# Altium PCB PCB_Project_Batteries_V2.PcbDoc
Units mm, origin at the board's own origin, x right, y up, seen from the top; angles counter-clockwise.
Board outline 92.15 x 89.13 mm, 2 copper layers (Top Layer, Bottom Layer), stack 1.57 mm thick; 37 components, 11 nets, 192 pads, 7 vias.
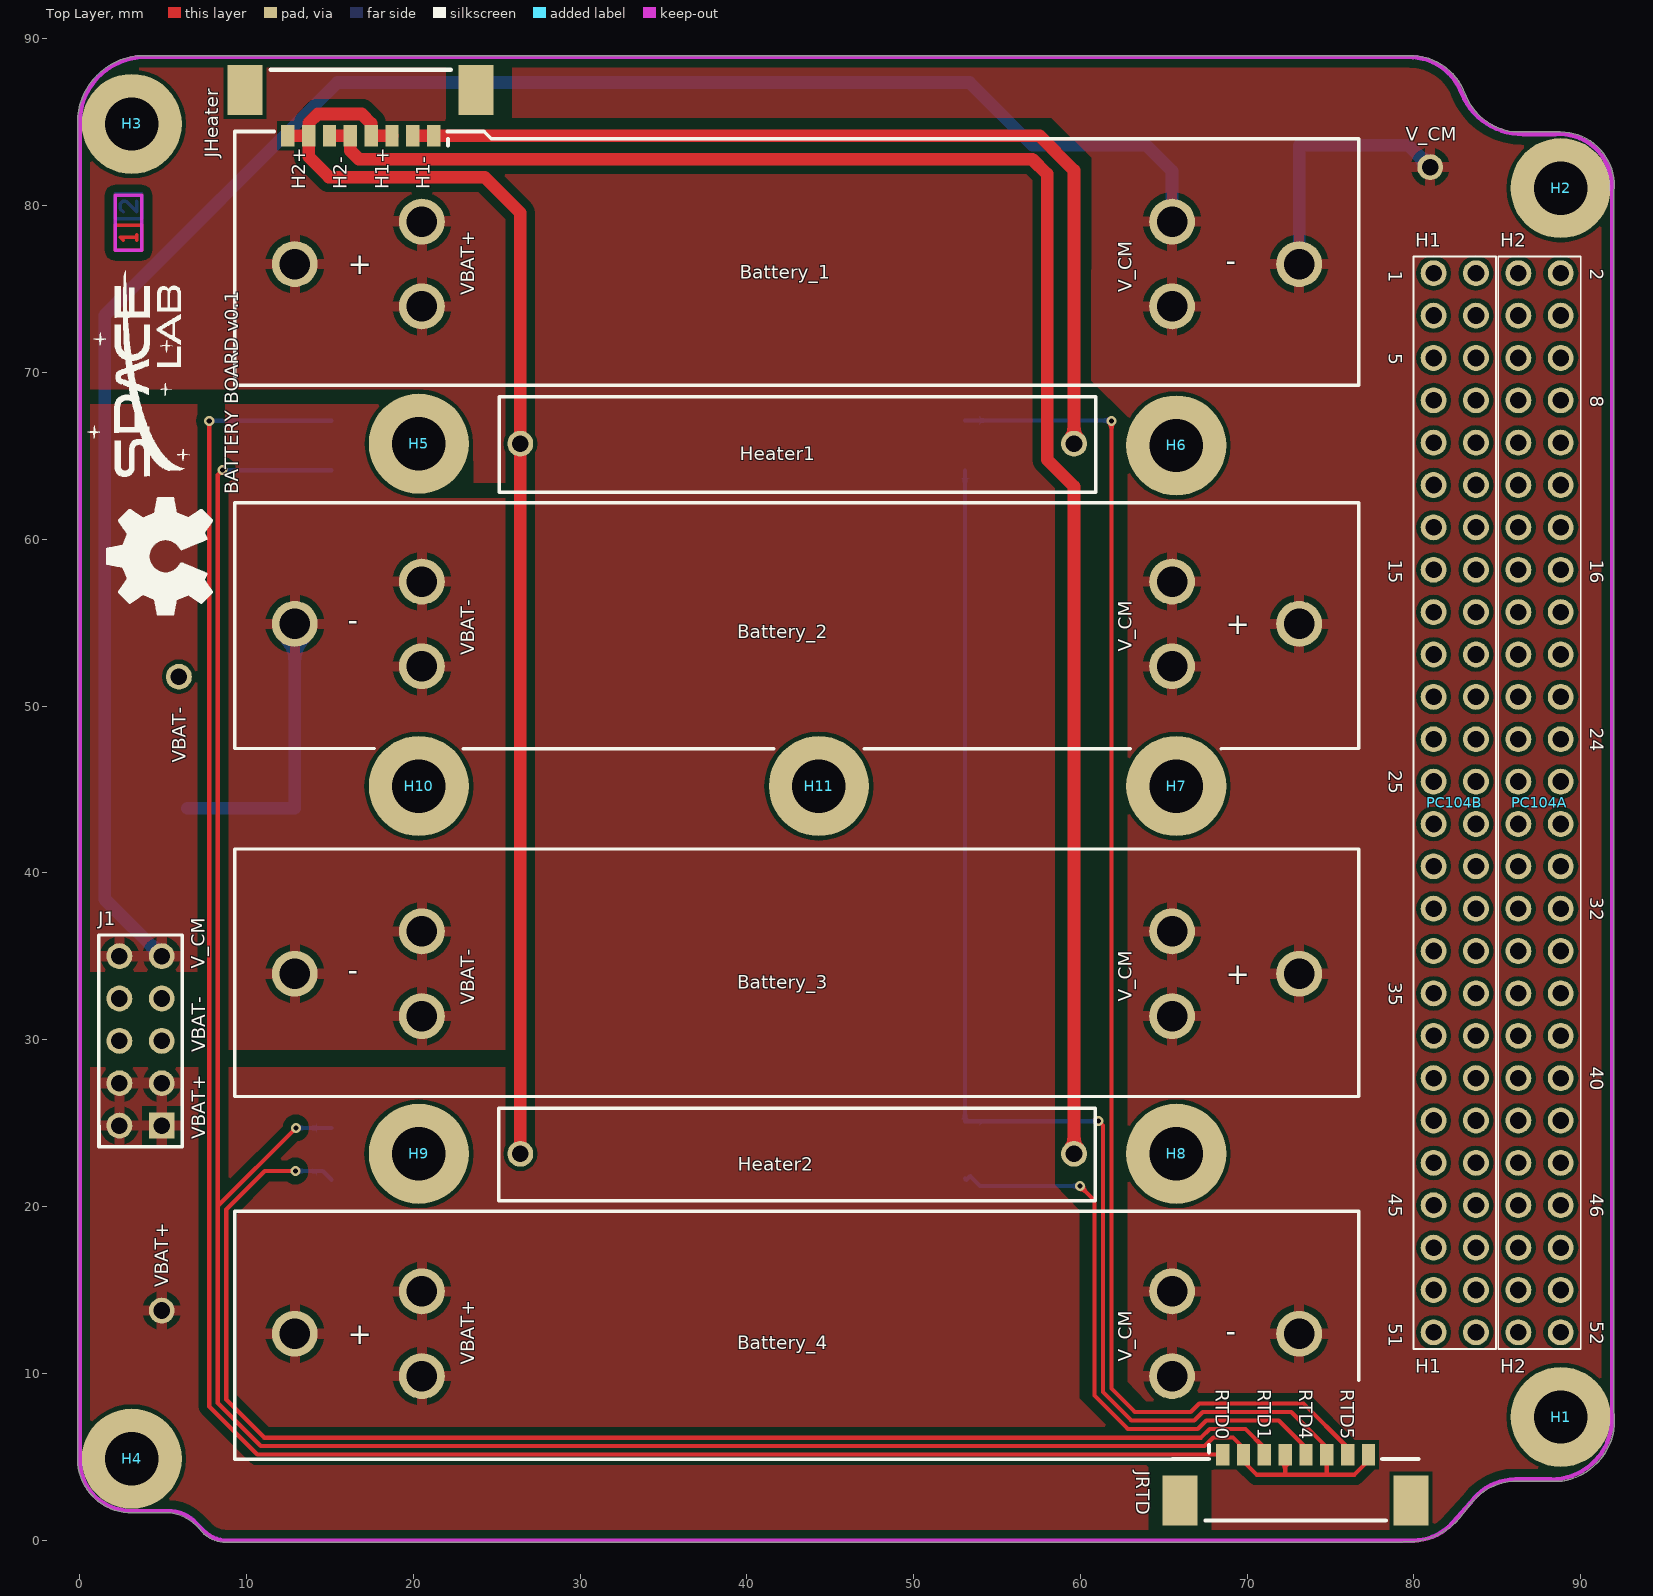
[diagram p0: Top Layer view]
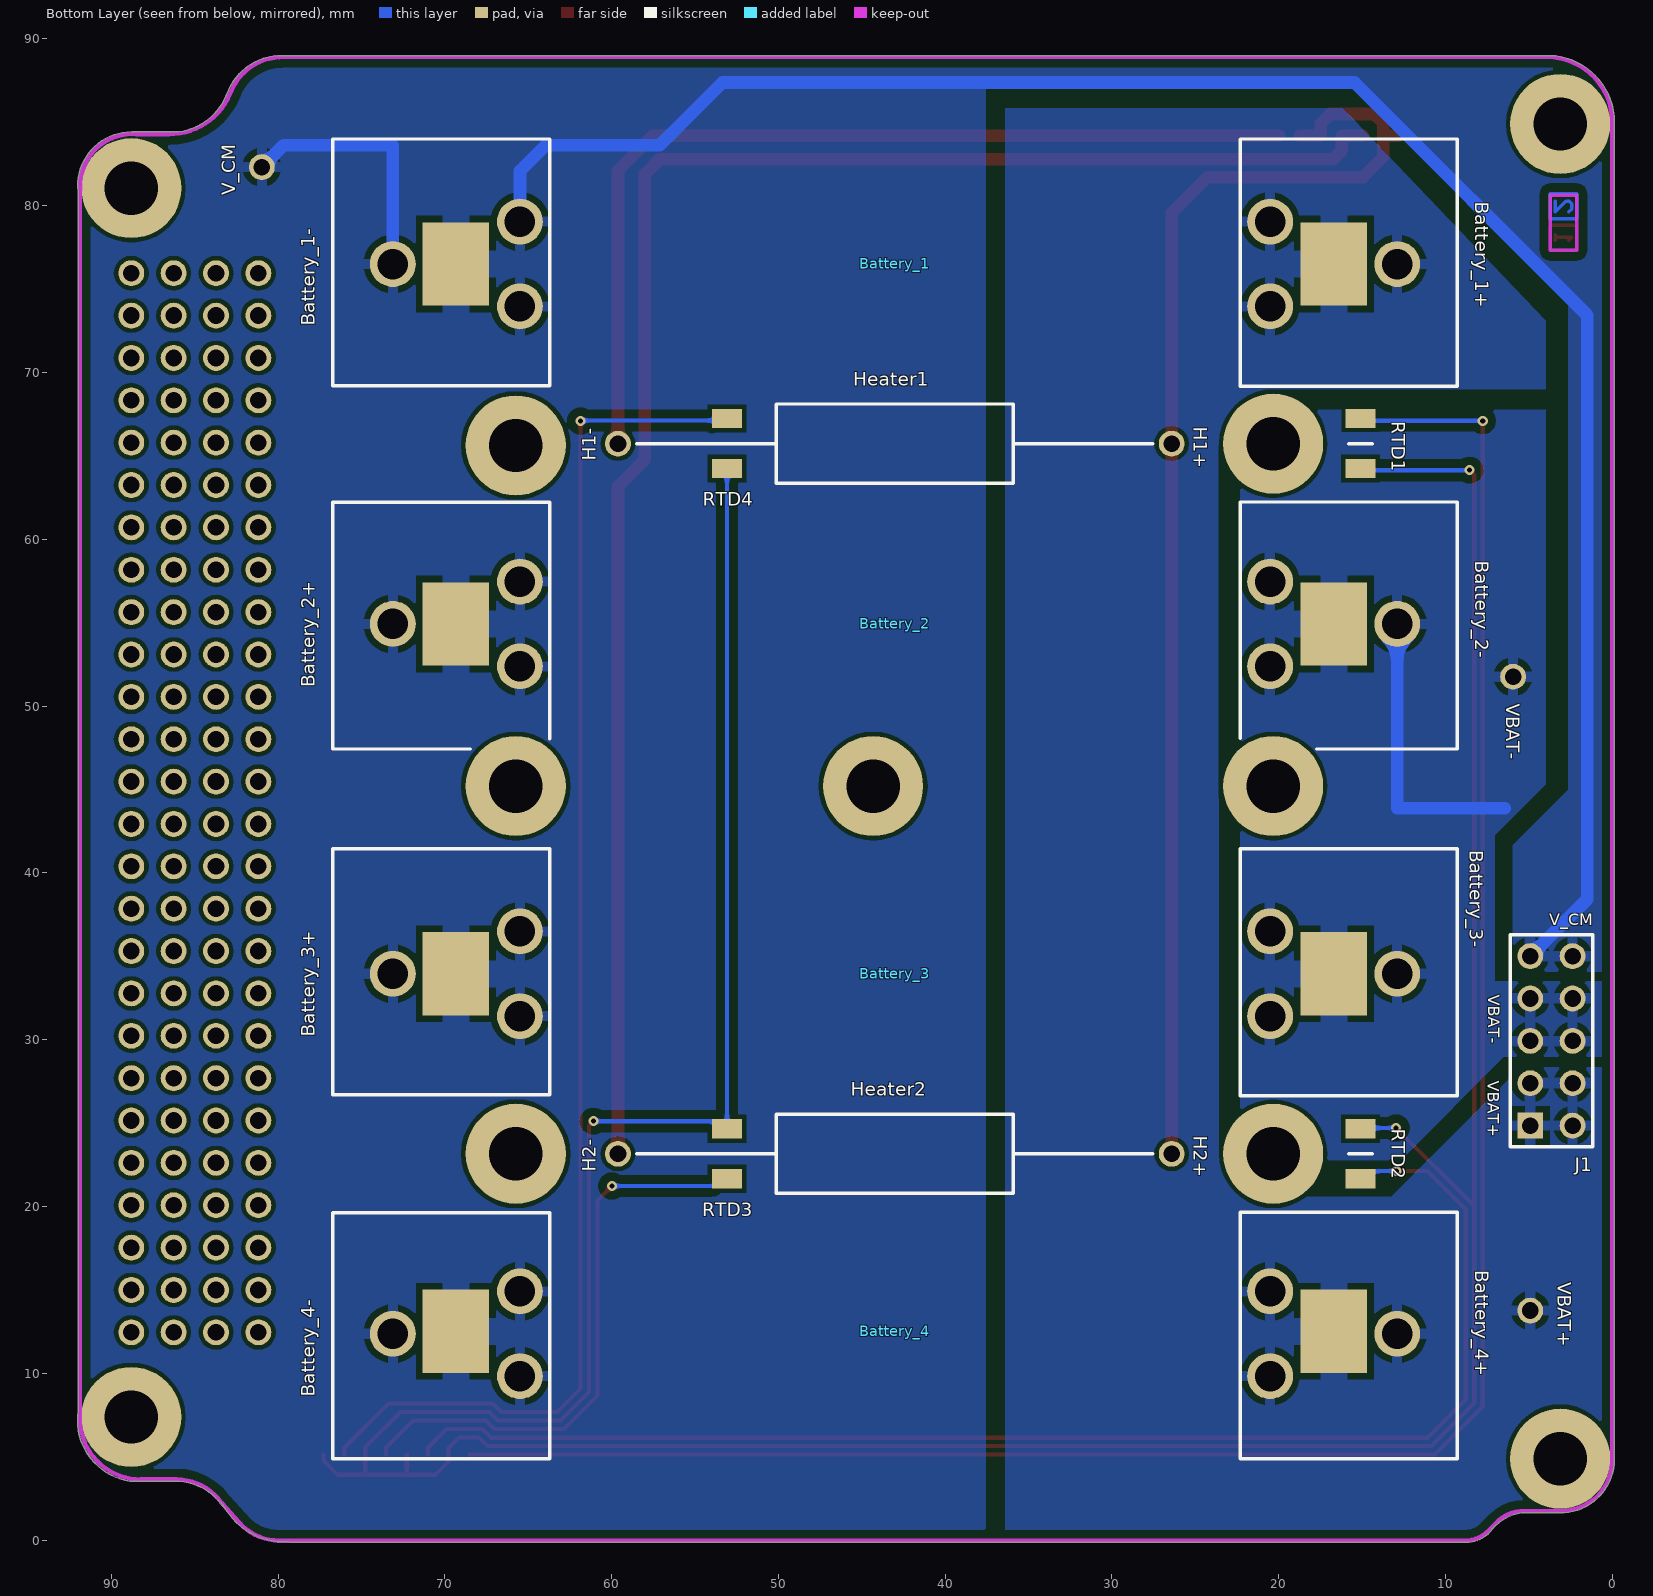
[diagram p1: Bottom Layer view, seen from below]

## Layer stack, top to bottom
Top Solder: solder mask 0.0099, Solder Resist, Dk 3.5
Top Layer: signal copper 0.0351
Dielectric Core: core 1.5001, FR-4, Dk 4.2
Bottom Layer: signal copper 0.0351
Bottom Solder: solder mask 0.0099, Solder Resist, Dk 3.5

## Board outline
92.004,81.131 92.003,81.056 cw(c91.907,81.053) 91.98,80.99 91.98,7.734 cw(c88.338,7.193) 92.02,7.191 cw(c88.316,7.191) 88.869,3.528 88.85,3.527 85.955,3.527 ccw(c86.222,-0.12) 83.133,1.837 cw(c79.593,4.08) 79.349,-0.104 cw(c79.275,0.003) 79.275,-0.127 8.726,-0.127 cw(c8.704,1.69) 7.33,0.501 ccw(c4.991,-1.263) 5.47,1.627 3.15,1.627 cw(c3.123,4.877) -0.127,4.853 -0.128,85.004 cw(c-0.033,85.004) -0.124,85.033 cw(c3.884,84.999) 3.799,89.006 3.825,89.007 79.724,89.007 cw(c79.778,85.51) 83.07,86.689 ccw(c86.414,87.986) 85.946,84.43 88.78,84.43 cw(c88.78,81.205)

## Design rules (kind name [scope] priority, off if disabled: settings)
Clearance [All] p1: gap=0.254 ignorepadtopadclearanceinfootprint=FALSE except(0: Arc-Hole Track-Hole SMDPad-Hole THPad-Hole Via-Hole Fill-Hole Poly-Hole Region-Hole Text-Hole; 0.508: Arc-Fill Arc-Poly Arc-Region Track-Fill Track-Poly Track-Region Via-Fill Via-Poly Via-Region Fill-Fill Fill-Poly Fill-Region Poly-Poly Poly-Region Region-Region)
ComponentClearance [All] p1 off: gap=0.254 collisioncheckmode=3 verticalgap=0.254 showdistances=TRUE
HoleSize [All] p1: absolutevalues=TRUE maxlimit=3.81 minlimit=0.025 maxpercent=80.000 minpercent=20.000
MinimumSolderMaskSliver [All] p1: minsoldermaskwidth=0.076
PolygonConnect [All] p1: thpad.connectstyle=Relief thpad.reliefconductorwidth=0.635 thpad.reliefentries=4 thpad.polygonreliefangle="90 Angle" thpad.airgapwidth=0.381 smdpad.connectstyle=Relief smdpad.reliefconductorwidth=1.651 smdpad.reliefentries=4 smdpad.polygonreliefangle="90 Angle" smdpad.airgapwidth=0.381 via.connectstyle=Relief via.reliefconductorwidth=0.635 via.reliefentries=4 via.polygonreliefangle="90 Angle" via.airgapwidth=0.381
RoutingVias [All] p1: holewidth=0.254 width=0.508 viastyle="Through Hole" minholewidth=0.127 minwidth=0.254 maxholewidth=1.27 maxwidth=1.27
SilkToSolderMaskClearance [IsPad] p1: minsilkscreentomaskgap=0.152 clearancetoexposedcopper=TRUE
SolderMaskExpansion [All] p1: expansion=0.102
UnpouredPolygon [All] p1: allowunpoured=TRUE allowshelved=TRUE
Width [All] p1: maxlimit=1.778 minlimit=0.127 preferedwidth=0.254
25 further rules are at their usual default settings.

## Components (designator, comment, footprint, x,y, rotation, side; value= is the part's Value field where it differs from the comment)
Battery_1 "BATTERY" BATTERY 43.02,76.511 r0 bottom
Battery_1+ "Holder_battery_18650" 54#1 22.299,76.507 r0 bottom
Battery_1- "Holder_battery_18650" 54#1 63.712,76.507 r180 bottom
Battery_2 "BATTERY" BATTERY 43.02,54.927 r180 bottom
Battery_2+ "Holder_battery_18650" 54#2 63.712,54.927 r180 bottom
Battery_2- "Holder_battery_18650" 54#1 22.299,54.927 r0 bottom
Battery_3 "BATTERY" BATTERY 43.02,33.953 r180 bottom
Battery_3+ "Holder_battery_18650" 54#1 63.712,33.953 r180 bottom
Battery_3- "Holder_battery_18650" 54#1 22.299,33.953 r0 bottom
Battery_4 "BATTERY" BATTERY 43.02,12.513 r0 bottom
Battery_4+ "Holder_battery_18650" 54#1 22.299,12.373 r0 bottom
Battery_4- "Holder_battery_18650" 54#1 63.712,12.373 r180 bottom
H1 "M3" "M3 hole"#1 88.8,7.379 r0 top
H2 "M3" "M3 hole"#2 88.791,81.058 r0 top
H3 "M3" "M3 hole"#3 3.125,84.904 r0 top
H4 "M3" "M3 hole"#4 3.125,4.879 r0 top
H5 "M3" "M3 hole"#4 20.336,65.735 r0 top
H6 "M3" "M3 hole"#5 65.746,65.627 r0 top
H7 "M3" "M3 hole"#6 65.746,45.207 r0 top
H8 "M3" "M3 hole"#7 65.746,23.163 r0 top
H9 "M3" "M3 hole"#8 20.336,23.16 r0 top
H10 "M3" "M3 hole"#9 20.336,45.207 r0 top
H11 "M3" "M3 hole"#10 44.321,45.207 r0 top
Heater1 "24R/3W" RESAD3322W86L1422D475 59.619,65.735 r180 bottom
Heater2 "24R/3W" RESAD3322W86L1422D475 59.619,23.16 r180 bottom
J1 "Header 10_pos" HDRV10W64P254_2X5_1270X502X521P 4.92,24.85 r90 top
JHeater "Header 8_PicoBlade" 53398-0871 16.851,84.454 r180 top
JRTD "Header 8_PicoBlade" 53398-0871 72.901,4.867 r0 top
PC104A "ESQ-126-39-G-D" ESQ-126-Y-X-D 88.796,75.956 r90 top
PC104B "ESQ-126-39-G-D" ESQ-126-Y-X-D 83.716,75.956 r90 top
RTD1 "32207595" THRMC3216X70N 15.1,65.739 r270 bottom
RTD2 "32207595" THRMC3216X70N 15.1,23.164 r90 bottom
RTD3 "32207595" THRMC3216X70N 53.081,23.16 r90 bottom
RTD4 "32207595" THRMC3216X70N 53.081,65.74 r270 bottom
V_CM "TEST_POINT" Test_Point 80.972,82.314 r90 top
VBAT+ "TEST_POINT" Test_Point 4.92,13.759 r90 top
VBAT- "TEST_POINT" Test_Point 5.948,51.763 r90 top

## Footprints (in the part's own frame and the unit in brackets; to place one, negate y for a bottom-side part, rotate by r counter-clockwise, add the part's x,y. Pads: shape width x height; smd on the part's side, far side on the other; paste and mask are expansions set on the pad)
54#1 [mm]
  round 2.75 hole 1.83: 1(-1.78,2.54) 2(-1.78,-2.54) 3(-9.4,0)
  silkscreen extent -13,-7.5 0,7.33
54#2 [mm]
  round 2.75 hole 1.83 mask+0: 1(-1.78,2.54)
  round 2.75 hole 1.83: 2(-1.78,-2.54) 3(-9.4,0)
  silkscreen extent -13,-7.5 0,7.3
53398-0871 [mm]
  rect 0.8x1.3 smd: 1(-4.375,0.258) 2(-3.125,0.258) 3(-1.875,0.258) 4(-0.625,0.258) 5(0.625,0.258) 6(1.875,0.258) 7(3.125,0.258) 8(4.375,0.258)
  rect 2.1x3 smd: 9(-6.925,-2.492) 10(6.925,-2.492)
  silkscreen extent -7.37,-3.7 7.37,0, body extent -7.57,-3.94 7.58,0.26, height 4.7
BATTERY [mm] "Battery"
  rect 4x5 smd: 1(-26.32,0) 2(26.32,0)
ESQ-126-Y-X-D [mm]
  round 1.55 hole 1: 1(0,0) 2(0,2.54) 3(-2.54,0) 4(-2.54,2.54) 5(-5.08,0) 6(-5.08,2.54) 7(-7.62,0) 8(-7.62,2.54) 9(-10.16,0) 10(-10.16,2.54) 11(-12.7,0) 12(-12.7,2.54) 13(-15.24,0) 14(-15.24,2.54) 15(-17.78,0) 16(-17.78,2.54) 17(-20.32,0) 18(-20.32,2.54) 19(-22.86,0) 20(-22.86,2.54) 21(-25.4,0) 22(-25.4,2.54) 23(-27.94,0) 24(-27.94,2.54) 25(-30.48,0) 26(-30.48,2.54) 27(-33.02,0) 28(-33.02,2.54) 29(-35.56,0) 30(-35.56,2.54) 31(-38.1,0) 32(-38.1,2.54) 33(-40.64,0) 34(-40.64,2.54) 35(-43.18,0) 36(-43.18,2.54) 37(-45.72,0) 38(-45.72,2.54) 39(-48.26,0) 40(-48.26,2.54) 41(-50.8,0) 42(-50.8,2.54) 43(-53.34,0) 44(-53.34,2.54) 45(-55.88,0) 46(-55.88,2.54) 47(-58.42,0) 48(-58.42,2.54) 49(-60.96,0) 50(-60.96,2.54) 51(-63.5,0) 52(-63.5,2.54)
  silkscreen extent -64.5,-1.2 1,3.74
HDRV10W64P254_2X5_1270X502X521P [mm]
  rect 1.55x1.55 hole 1: 1(0,0)
  round 1.55 hole 1: 2(0,2.54) 3(2.54,0) 4(2.54,2.54) 5(5.08,0) 6(5.08,2.54) 7(7.62,0) 8(7.62,2.54) 9(10.16,0) 10(10.16,2.54)
  silkscreen extent -1.27,-1.24 11.43,3.78, body extent -1.1,-1.16 11.6,3.66, height 8.28
"M3 hole"#1 [mm]
  round 6 hole 3.2: 1(0,0)
"M3 hole"#2 [mm]
  round 6 hole 3.2: 2(0,0)
"M3 hole"#3 [mm]
  round 6 hole 3.2: 3(0,0)
"M3 hole"#4 [mm]
  round 6 hole 3.2: 5(0,0)
"M3 hole"#5 [mm]
  round 6 hole 3.2: 6(0,0)
"M3 hole"#6 [mm]
  round 6 hole 3.2: 7(0,0)
"M3 hole"#7 [mm]
  round 6 hole 3.2: 8(0,0)
"M3 hole"#8 [mm]
  round 6 hole 3.2: 9(0,0)
"M3 hole"#9 [mm]
  round 6 hole 3.2: 10(0,0)
"M3 hole"#10 [mm]
  round 6 hole 3.2: 11(0,0)
RESAD3322W86L1422D475 [mm]
  round 1.55 hole 1: 1(0,0) 2(33.2,0)
  silkscreen extent 1.14,-2.37 32.06,2.37, body extent -0.43,-2.77 33.65,2.77, height 5.54
Test_Point [mm]
  round 1.55 hole 1: 1(0,0)
THRMC3216X70N [mm]
  rect 1.15x1.8 smd: 1(-1.5,0) 2(1.5,0)
  silkscreen extent 0,-0.7 0,0.7, body extent -1.6,-0.8 1.6,0.8, height 0.7

## Part data
Battery_1 Battery_2 Battery_3 Battery_4: "Battery Pads"
Battery_1+ Battery_1- Battery_2+ Battery_2- Battery_3+ Battery_3- Battery_4+ Battery_4-: library part 54, "Cylindrical Battery Contacts, Clips, Holders & Springs 16-19mm PC BATTERY CLIP", Manufacturer_Name="Keystone Electronics", Mouser Part Number=534-54, Allied_Number=70229904, Allied Price/Stock=http://www.alliedelec.com/keystone-electronics-54/70229904/, Datasheet Link=http://www.farnell.com/datasheets/1703960.pdf, Manufacturer_Part_Number=54, Mouser Price/Stock=https://www.mouser.co.uk/ProductDetail/Keystone-Electronics/54?qs=73q%2FgRcW4F3NakoJDesViw%3D%3D
H1 H2 H3 H4 H5 H6 H7 H8 H9 H10 H11: library part "M3 hole", "M3 hole"
Heater1 Heater2: library part RS02B24R00FE12, "Wirewound Resistors - Through Hole 3watts 24ohms 1%", Manufacturer_Name=Vishay, Allied_Number=71331327, Allied Price/Stock=https://www.alliedelec.com/vishaydale-rs02b24r00fe12/71331327/, Datasheet Link=https://www.vishay.com/docs/30204/rsns.pdf, Manufacturer_Part_Number=RS02B24R00FE12
J1: library part 67996-110HLF, "Connector", Manufacturer_Name=SAMTEC, Mouser Part Number=649-67996-110HLF, Height=5.84mm, Manufacturer_Part_Number=67996-110HLF, Mouser Price/Stock=https://br.mouser.com/ProductDetail/?qs=zh4O8xspOuxgf2RA9jR3ZQ%3D%3D
JHeater JRTD: library part 53398-0871, "Headers & Wire Housings VERTICAL HDR SMT 8P", Manufacturer_Name=Molex, Mouser2 Part Number=538-53398-0871, Datasheet Link=https://componentsearchengine.com/Datasheets/1/53398-0871.pdf, Manufacturer_Part_Number=53398-0871, Mouser2 Price/Stock=https://www.mouser.com/Search/Refine.aspx?Keyword=538-53398-0871
PC104A PC104B: "PC / 104 Connectors .100\" PC/104 Elevated Socket Strip", Manufacturer_Name=SAMTEC, Mouser Part Number=200-ESQ12639GD, RS Part Number=1595654, Datasheet Link=http://suddendocs.samtec.com/catalog_english/esq_th.pdf, Height=13.84mm, Manufacturer_Part_Number=ESQ-126-39-G-D, Mouser Price/Stock=https://www.mouser.co.uk/ProductDetail/Samtec/ESQ-126-39-G-D?qs=Cqqh%252BS766wm7W672HSOlSA%3D%3D, RS Price/Stock=http://uk.rs-online.com/web/p/products/1595654
RTD1 RTD2 RTD3 RTD4: "Board Mount Temperature Sensors SMD1206(V) Pt 1000 Class B -50 to +130C", Manufacturer_Name="Heraeus Nexensos", Datasheet Link=https://componentsearchengine.com/Datasheets/1/32207595.pdf, Height=0.7mm, Manufacturer_Part_Number=32207595
V_CM VBAT+ VBAT-: "Test Point - Headers & Wire Housings .100\" Terminal Strip"

## Via types
v1: diameter 0.6, hole 0.3, Top Layer to Bottom Layer, tented both sides, 7 vias

## Nets (pads, with @x,y where several pads share a name; then routed paths per layer and width w, separated by ;. In a path a pad name is that pad's centre, name@x,y a point inside that pad or via, vN(x,y) a via of type N, cw(c..) or ccw(c..) an arc to the next point about the centre after c; other vN are vias at no path point)
+1VBat: Battery_1+.1 Battery_1+.2 Battery_1+.3 Battery_1.1 Battery_4+.1 Battery_4+.2 Battery_4+.3 Battery_4.1 J1.1 J1.2 J1.3 J1.4 VBAT+.1
+2VBat: Battery_1-.1 Battery_1-.2 Battery_1-.3 Battery_1.2 Battery_2+.1 Battery_2+.2 Battery_2+.3 Battery_2.1 Battery_3+.1 Battery_3+.2 Battery_3+.3 Battery_3.1 Battery_4-.1 Battery_4-.2 Battery_4-.3 Battery_4.2 J1.9 J1.10 V_CM.1 | length 130.4
  Bottom Layer w0.762: J1.9 1.505,38.425 1.505,73.435 15.463,87.393 53.345,87.393 57.118,83.62 63.956,83.62 65.492,82.084 Battery_1-.1 ; Battery_1-.3 73.112,83.624 79.662,83.624 V_CM.1
-2VBat: Battery_2-.1 Battery_2-.2 Battery_2-.3 Battery_2.2 Battery_3-.1 Battery_3-.2 Battery_3-.3 Battery_3.2 J1.5 J1.6 J1.7 J1.8 VBAT-.1 | length 17.5
  Bottom Layer w0.762: 6.468,43.875 12.899,43.875 Battery_2-.3
-Heater1_Voltage: Heater1.1 JHeater.1 JHeater.2 | length 57
  Top Layer w0.762: JHeater.2 JHeater.1 57.544,84.196 59.619,82.12 Heater1.1@59.619,65.627
-Heater2_Voltage: Heater2.1 JHeater.5 JHeater.6 | length 103.9
  Top Layer w0.762: JHeater.6 JHeater.5 16.226,83.312 16.747,82.791 57.112,82.791 58.004,81.899 58.004,64.778 59.619,63.163 Heater2.1@59.619,23.163
RTD0: JRTD.1 RTD1.1 | length 128.4
  Top Layer w0.254: v1(7.769,67.105) 7.769,64.071 7.769,20.846 7.77,20.844 7.77,19.456 7.769,19.455 7.769,8.984 7.77,8.983 7.77,8.001 10.646,5.125 JRTD.1
  Bottom Layer w0.254: v1(7.769,67.105) RTD1.1@15.1,67.105
RTD1: JRTD.3 RTD2.1 | length 83.2
  Top Layer w0.254: v1(12.931,22.127) 11.1,22.127 8.786,19.813 8.786,8.422 11.067,6.141 67.235,6.141 67.758,6.664 69.896,6.664 71.026,5.534 JRTD.3
  Bottom Layer w0.254: v1(12.931,22.127) 14.574,22.127 RTD2.1@15.1,21.601
RTD4: JRTD.5 RTD3.1 | length 35
  Top Layer w0.254: v1(59.984,21.225) 60.841,20.368 60.841,8.664 62.843,6.662 67.037,6.662 67.547,7.172 71.889,7.172 73.526,5.535 JRTD.5
  Bottom Layer w0.254: RTD3.1@53.081,21.663 53.158,21.586 53.39,21.818 53.983,21.225 v1(59.984,21.225)
RTD5: JRTD.7 RTD4.1 | length 83.3
  Top Layer w0.254: v1(61.857,67.099) 61.857,9.085 63.264,7.678 66.617,7.678 67.127,8.188 73.375,8.188 76.026,5.537 JRTD.7
  Bottom Layer w0.254: RTD4.1@53.081,67.127 v1@61.857,67.127
RTD_Common: JRTD.2 JRTD.4 JRTD.6 JRTD.8 RTD1.2 RTD2.2 RTD3.2 RTD4.2 | length 225.2
  Top Layer w0.254: v1(8.56,64.144) 8.278,63.862 8.278,20.023 ; v1(12.962,24.707) 8.278,20.023 ; v1(61.095,25.113) 61.349,24.859 61.349,8.875 63.054,7.17 66.827,7.17 67.337,7.68 72.641,7.68 74.776,5.545 JRTD.6 74.776,3.923 ; JRTD.4 72.276,3.923 ; JRTD.8 77.276,4.762 76.437,3.923 74.776,3.923 ; 8.278,20.023 8.278,8.211 10.857,5.633 67.445,5.633 67.968,6.156 69.144,6.156 69.776,5.524 JRTD.2 69.776,4.713 70.566,3.923 72.276,3.923 ; 72.276,3.923 74.776,3.923
  Bottom Layer w0.254: v1(8.56,64.144) RTD1.2@15.1,64.144 ; v1(12.962,24.707) RTD2.2@15.1,24.707 ; RTD4.2@53.081,64.127 53.081,25.113 v1(61.095,25.113)
VBus: Heater1.2 Heater2.2 JHeater.3 JHeater.4 JHeater.7 JHeater.8 | length 79.6
  Top Layer w0.762: JHeater.8@12.85,84.196 JHeater.7 ; JHeater.3 JHeater.4 17.476,84.938 16.909,85.505 14.277,85.505 13.726,84.954 JHeater.7 ; Heater2.2@26.42,23.163 Heater1.2 26.42,79.567 24.269,81.717 14.954,81.717 13.726,82.945 JHeater.7
pads on no net: H1.1 H2.2 H3.3 H4.5 H5.5 H6.6 H7.7 H8.8 H9.9 H10.10 H11.11 JHeater.9 JHeater.10 JRTD.9 JRTD.10 PC104A.1 PC104A.2 PC104A.3 PC104A.4 PC104A.5 PC104A.6 PC104A.7 PC104A.8 PC104A.9 PC104A.10 PC104A.11 PC104A.12 PC104A.13 PC104A.14 PC104A.15 PC104A.16 PC104A.17 PC104A.18 PC104A.19 PC104A.20 PC104A.21 PC104A.22 PC104A.23 PC104A.24 PC104A.25 PC104A.26 PC104A.27 PC104A.28 PC104A.29 PC104A.30 PC104A.31 PC104A.32 PC104A.33 PC104A.34 PC104A.35 PC104A.36 PC104A.37 PC104A.38 PC104A.39 PC104A.40 PC104A.41 PC104A.42 PC104A.43 PC104A.44 PC104A.45 PC104A.46 PC104A.47 PC104A.48 PC104A.49 PC104A.50 PC104A.51 PC104A.52 PC104B.1 PC104B.2 PC104B.3 PC104B.4 PC104B.5 PC104B.6 PC104B.7 PC104B.8 PC104B.9 PC104B.10 PC104B.11 PC104B.12 PC104B.13 PC104B.14 PC104B.15 PC104B.16 PC104B.17 PC104B.18 PC104B.19 PC104B.20 PC104B.21 PC104B.22 PC104B.23 PC104B.24 PC104B.25 PC104B.26 PC104B.27 PC104B.28 PC104B.29 PC104B.30 PC104B.31 PC104B.32 PC104B.33 PC104B.34 PC104B.35 PC104B.36 PC104B.37 PC104B.38 PC104B.39 PC104B.40 PC104B.41 PC104B.42 PC104B.43 PC104B.44 PC104B.45 PC104B.46 PC104B.47 PC104B.48 PC104B.49 PC104B.50 PC104B.51 PC104B.52
copper on no net: | length 16.6
  Top Layer w0.2: 2.603,77.93 2.428,78.105 3.428,78.105 ; 3.428,77.93 3.428,78.105 ; 3.428,78.28 3.428,78.105 ; 2.128,77.33 2.128,78.83 3.728,78.83 3.728,77.33 2.128,77.33
  Bottom Layer w0.2: 2.603,79.63 2.428,79.805 2.428,80.13 2.578,80.28 2.778,80.28 3.428,79.63 3.428,80.28 ; 2.128,79.23 2.128,80.73 3.728,80.73 3.728,79.23 2.128,79.23

## Polygon pours and split planes (outlines as drawn)
-2VBat on Bottom Layer "Bottom Layer--2VBat" (solid, pour order 110): 4.003,67.756 20.421,67.756 22.311,65.842 22.311,22.77 12.708,22.77 6.502,28.976 0.062,28.976 0.046,33.491 7.061,33.491 7.061,42.254 4.003,45.312
+2VBat on Bottom Layer "VBat_Common_poly" (solid, pour order 134): 79.275,-0.127 81.169,-0.127 84.824,3.528 89.876,3.528 91.98,5.632 91.98,82.544 90.087,84.437 85.322,84.437 80.735,89.024 79.275,89.024 37.571,89.015 37.554,-0.162
+2VBat on Bottom Layer "Bottom Layer-+2VBat 2" (solid, pour order 84): 2.657,44.985 2.657,74.325 15.339,87.007 37.579,87.007 37.579,89.015 2.657,89.015 -0.124,86.234 -0.124,34.086 5.983,34.086 5.983,36.527 5.983,41.659
+1VBat on Bottom Layer "Bottom Layer-+1VBat" (solid, pour order 138): 4.003,73.115 16.166,85.854 36.409,85.854 36.409,-0.127 7.958,-0.127 6.204,1.627 1.925,1.627 -0.125,3.677 -0.092,7.922 -0.123,7.953 -0.095,28.349 5.498,28.349 13.251,20.596 20.894,20.596 23.596,23.298 23.613,65.663 20.261,69.004 4.003,69.004
+2VBat on Bottom Layer "Bottom Layer-+2VBat 1" (solid, pour order 68): 79.486,83.53
+1VBat on Top Layer "Bottom Layer-+1VBat" (solid, pour order 132): 27.078,63.387 23.618,63.387 23.598,66.005 20.583,69.011 -0.132,69.011 -0.133,85.611 3.109,89.006 21.935,89.006 21.935,85.28 22.729,84.486 56.738,84.486 58.462,82.762 58.462,21.291 59.929,19.775 59.929,8.499 64.067,4.361 64.067,-0.127 58.462,-0.127 7.958,-0.127 6.204,1.627 1.925,1.627 -0.125,3.677 -0.092,7.922 -0.123,7.953 -0.095,28.349 5.686,28.349 27.064,28.349
+2VBat on Top Layer "VBat_Common_poly" (solid, pour order 136): 60.666,82.87 58.266,85.27 25.929,85.27 25.929,89.02 60.667,89.02 79.275,89.024 80.735,89.024 85.322,84.437 90.087,84.437 91.98,82.544 91.98,5.632 89.876,3.528 84.824,3.528 81.169,-0.127 79.275,-0.127 71.993,-0.133 67.886,-0.133 67.886,4.18 62.83,9.491 62.83,67.352 60.664,69.518
+2VBat on Top Layer "Bottom Layer-+2VBat 2" (solid, pour order 142): 0.08,62.104 0.08,68.099 7.055,68.099 7.055,34.086 0.08,34.086 0.08,36.527
-2VBat on Top Layer "Bottom Layer--2VBat" (solid, pour order 140): 26.052,62.471 20.336,62.471 20.336,66.22 18.48,68.099 8.726,68.099 8.726,29.392 26.052,29.392

## Keep-outs
Keep-Out Layer:
  lines w0.2: 2.128,77.33 3.728,77.33 3.728,80.63 2.128,80.63 2.128,77.33
  lines w0.254: -0.002,4.783 -0.002,85.181 cw(c3.953,84.965) 4.008,88.926 ; 0.009,4.695 ccw(c3.026,4.783) 2.74,1.778 ; 2.767,1.751 5.333,1.751 ; 3.953,88.917 79.634,88.917 cw(c79.712,85.554) 82.877,86.693 ccw(c86.526,88.252) 86.549,84.284 ; 5.262,1.749 cw(c5.333,-0.472) 6.846,1.156 ; 6.844,1.154 7.423,0.575 ccw(c8.827,1.907) 8.889,-0.028 79.93,-0.028 ; 79.957,-0.026 ccw(c79.93,3.194) 82.084,0.8 ; 82.088,0.797 83.377,2.226 83.377,2.232 ; 83.382,2.229 cw(c86.095,0.334) 86.067,3.643 88.223,3.643 ; 86.526,84.289 88.481,84.289 cw(c88.713,81.145) 91.862,80.979 ; 88.223,3.634 ccw(c88.235,7.277) 91.874,7.444 91.874,80.979

## Other copper
Top Layer:
  text "'.Layer_Name'" at 164.84,-36.827 h2.5
Bottom Layer:
  text "'.Layer_Name'" at 164.84,-36.827 h2.5

## Silkscreen, mask and mechanical layers (free items; w line width, h text height)
Top Overlay:
  drawing of 1016 lines, arcs and shapes, not listed
  text "H2+" at 13.527,80.994 h0.81 r90
  text "H2-" at 16.002,80.994 h0.81 r90
  text "H1+" at 18.538,80.994 h0.81 r90
  text "H1-" at 20.997,80.994 h0.81 r90
  text "H1" at 80.08,77.548 h0.81
  text "H2" at 85.16,77.548 h0.81
  text "2" at 90.582,76.227 h0.81 r270
  text "-" at 68.714,76.088 h1.27
  text "1" at 78.495,76.091 h0.81 r270
  text "+" at 16.074,75.881 h1.27
  text "Battery_1" at 39.566,75.621 h0.81
  text "V_CM" at 63.069,74.829 h0.81 r90
  text "VBAT+" at 23.646,74.637 h0.81 r90
  text "5" at 78.495,71.147 h0.81 r270
  text "8" at 90.582,68.607 h0.81 r270
  text "Heater1" at 39.566,64.728 h0.81
  text "BATTERY BOARD v0.1" at 9.509,62.714 h0.81 r90
  text "15" at 78.495,58.786 h0.81 r270
  text "16" at 90.582,58.786 h0.81 r270
  text "-" at 16.074,54.508 h1.27
  text "+" at 68.714,54.297 h1.27
  text "Battery_2" at 39.431,54.063 h0.81
  text "V_CM" at 63.069,53.249 h0.81 r90
  text "VBAT-" at 23.646,53.057 h0.81 r90
  text "24" at 90.582,48.693 h0.81 r270
  text "25" at 78.495,46.153 h0.81 r270
  text "32" at 90.582,38.533 h0.81 r270
  text "V_CM" at 7.511,34.246 h0.81 r90
  text "-" at 16.074,33.534 h1.27
  text "35" at 78.495,33.453 h0.81 r270
  text "+" at 68.714,33.323 h1.27
  text "Battery_3" at 39.431,33.046 h0.81
  text "V_CM" at 63.069,32.275 h0.81 r90
  text "VBAT-" at 23.646,32.083 h0.81 r90
  text "VBAT-" at 7.527,29.245 h0.81 r90
  text "40" at 90.582,28.373 h0.81 r270
  text "VBAT+" at 7.527,24.032 h0.81 r90
  text "Heater2" at 39.466,22.134 h0.81
  text "45" at 78.495,20.753 h0.81 r270
  text "46" at 90.582,20.753 h0.81 r270
  text "52" at 90.582,13.133 h0.81 r270
  text "51" at 78.495,12.998 h0.81 r270
  text "-" at 68.714,11.899 h1.27
  text "+" at 16.074,11.743 h1.27
  text "Battery_4" at 39.431,11.442 h0.81
  text "V_CM" at 63.069,10.695 h0.81 r90
  text "VBAT+" at 23.646,10.503 h0.81 r90
  text "H1" at 80.078,10.025 h0.81
  text "H2" at 85.158,10.025 h0.81
  text "RTD0" at 68.12,9.05 h0.81 r270
  text "RTD1" at 70.62,9.05 h0.81 r270
  text "RTD4" at 73.12,9.05 h0.81 r270
  text "RTD5" at 75.62,9.05 h0.81 r270
  text "'.Layer_Name'" at 164.84,-36.827 h2.5
Bottom Overlay:
  lines w0.203: 1.17,23.579 6.131,23.579 6.131,36.284 1.17,36.284 1.17,23.579
  text "V_CM" at 82.573,80.622 h0.81 r270
  text "H1+" at 25.101,66.751 h0.81 r90
  text "H1-" at 60.957,64.719 h0.81 r270
  text "VBAT-" at 6.35,50.139 h0.81 r90
  text "V_CM" at 3.795,36.851 h0.7
  text "VBAT-" at 7.439,32.709 h0.7 r90
  text "VBAT+" at 7.458,27.55 h0.7 r90
  text "H2+" at 25.101,24.244 h0.81 r90
  text "J1" at 2.261,22.104 h0.81
  text "H2-" at 60.957,22.079 h0.81 r270
  text "VBAT+" at 3.273,15.466 h0.81 r90
  text "'.Layer_Name'" at 164.84,-36.827 h2.5
Top Paste:
  text "'.Layer_Name'" at 164.84,-36.827 h2.5
Bottom Paste:
  text "'.Layer_Name'" at 164.84,-36.827 h2.5
Top Solder:
  region: 3.928,77.13 3.928,80.83 1.928,80.83 1.928,77.13
  lines w0.2: 1.928,77.33 ccw(c2.128,77.33) 2.128,77.13 3.728,77.13 ccw(c3.728,77.33) 3.928,77.33 3.928,80.63 ccw(c3.728,80.63) 3.728,80.83 2.128,80.83 ccw(c2.128,80.63) 1.928,80.63 1.928,77.33
  text "'.Layer_Name'" at 164.84,-36.827 h2.5
Bottom Solder:
  region: 3.928,77.13 3.928,80.83 1.928,80.83 1.928,77.13
  lines w0.2: 1.928,77.33 ccw(c2.128,77.33) 2.128,77.13 3.728,77.13 ccw(c3.728,77.33) 3.928,77.33 3.928,80.63 ccw(c3.728,80.63) 3.728,80.83 2.128,80.83 ccw(c2.128,80.63) 1.928,80.63 1.928,77.33
  text "'.Layer_Name'" at 164.84,-36.827 h2.5
Drill Guide:
  text "'.Layer_Name'" at 164.84,-36.827 h2.5
3D Body:
  text "'.Layer_Name'" at 164.87,-36.872 h2.5
Dimension:
  text "'.Layer_Name'" at 164.84,-36.827 h2.5
Mechanical 3:
  text "'.Layer_Name'" at 164.83,-36.82 h2.5
Mechanical 4:
  text "'.Layer_Name'" at 164.81,-36.84 h2.5
Mechanical 5:
  text "'.Layer_Name'" at 164.81,-36.84 h2.5
Board Edge:
  lines w0.254: 0.01,85.059 0.01,4.58 ccw(c3.006,4.763) 2.875,1.764 5.467,1.764 cw(c4.875,-1.437) 7.437,0.572 ccw(c8.694,1.612) 8.76,-0.018 79.24,-0.018 ccw(c79.386,4.378) 83.13,2.07 cw(c86.152,-0.037) 86.216,3.646 ; 0.011,85.091 cw(c3.825,85.059) 3.67,88.87 4.21,88.87 79.94,88.87 cw(c79.757,85.46) 82.95,86.67 ; 82.95,86.7 ccw(c86.335,87.888) 86.08,84.31 88.722,84.31 ; 86.152,3.646 88.454,3.646 ccw(c88.428,7.073) 91.854,7.1 91.854,81.181 ccw(c88.722,81.172) 88.75,84.304
Mechanical 13:
  text "'.Layer_Name'" at 164.87,-36.822 h2.5
Mechanical 15:
  text "'.Layer_Name'" at 164.84,-36.827 h2.5
Sheet:
  drawing of 235 lines, arcs and shapes, not listed
  text "1" at -3.985,136.322 h1.78
  text "2" at 68.659,136.322 h1.78
  text "3" at 141.811,136.322 h1.78
  text "4" at 214.709,136.322 h1.78
  text "A" at -38.326,113.309 h1.78
  text "A" at 248.694,113.309 h1.78
  text "Layer" at 118.558,87.258 h1.52
  text "Name" at 128.97,87.258 h1.52
  text "Material" at 153.855,87.258 h1.52
  text "Thickness" at 175.693,87.258 h1.52
  text "Constant" at 192.199,87.258 h1.52
  text "Board Layer Stack" at 206.673,87.258 h1.52
  text "1" at 118.558,84.21 h1.52
  text "Top Overlay" at 128.97,84.21 h1.52
  text "2" at 118.558,81.162 h1.52
  text "Top Solder" at 128.97,81.162 h1.52
  text "Solder Resist" at 153.855,81.162 h1.52
  text "0,010mm" at 175.693,81.162 h1.52
  text "3,5" at 192.199,81.162 h1.52
  text "3" at 118.558,78.114 h1.52
  text "Top Layer" at 128.97,78.114 h1.52
  text "Copper" at 153.855,78.114 h1.52
  text "0,035mm" at 175.693,78.114 h1.52
  text "4" at 118.558,75.066 h1.52
  text "Dielectric Core" at 128.97,75.066 h1.52
  text "FR-4" at 153.855,75.066 h1.52
  text "1,500mm" at 175.693,75.066 h1.52
  text "4,2" at 192.199,75.066 h1.52
  text "5" at 118.558,72.018 h1.52
  text "Bottom Layer" at 128.97,72.018 h1.52
  text "Copper" at 153.855,72.018 h1.52
  text "0,035mm" at 175.693,72.018 h1.52
  text "6" at 118.558,68.97 h1.52
  text "Bottom Solder" at 128.97,68.97 h1.52
  text "Solder Resist" at 153.855,68.97 h1.52
  text "0,010mm" at 175.693,68.97 h1.52
  text "3,5" at 192.199,68.97 h1.52
  text "7" at 118.558,65.922 h1.52
  text "Bottom Overlay" at 128.97,65.922 h1.52
  text "B" at -38.326,65.253 h1.78
  text "B" at 248.694,65.253 h1.78
  text "Fabrication specifications:" at 117.476,29.324 h3.1
  text "C" at -38.326,16.739 h1.78
  text "C" at 248.694,16.739 h1.78
  text "- Copper base 1OZ:  / - PCB Material: Prepeg FR4-Standard / - PCB Tickness: 1.6mm / - PCB Surface: HASL (with lead)" at 117.47,12.34 h1.73
  text "- Silkscreen Color: White (top and bottom) / - Soldermask Color: Green / - Vias: Force Complete Tenting / - Special: Stack-up (herein included)" at 175.17,12.34 h1.73
  text "Assembly specifications:" at 117.751,6.344 h3.1
  text "- Solder composition: Include lead / - Fiducials: 3 top and 3 bottom avaliable / - Check BOM for not placed components" at 117.745,-10.65 h1.73
  text "SpaceLab - Federal University of Santa Catarina" at 157.769,-27.289 h2.5
  text "D" at -38.326,-31.267 h1.78
  text "D" at 248.694,-31.267 h1.78
  text "Project:" at 157.769,-31.789 h2.5
  text "Battery Board 4 cells" at 165.769,-31.789 h2.5
  text "Layer:" at 157.769,-36.789 h2.5
  text "Designed by:" at 157.769,-41.789 h2.5
  text "Project Code:" at 215.769,-41.789 h2.5
  text "BAT2" at 230.269,-41.789 h2.5
  text "Amanda B. Medeiros (based on FSat-I Bat)" at 171.695,-41.822 h2.5
  text "v0.1" at 195.795,-46.722 h2.5
  text "Date:" at 157.769,-46.789 h2.5
  text "'.Print_Date'" at 163.769,-46.789 h2.5
  text "Version:" at 186.769,-46.789 h2.5
  text "Size:" at 215.769,-46.789 h2.5
  text "A4" at 221.769,-46.789 h2.5
  text "1" at -3.985,-51.638 h1.78
  text "2" at 68.659,-51.638 h1.78
  text "3" at 141.811,-51.638 h1.78
  text "4" at 214.709,-51.638 h1.78
Drill Drawing:
  circle w0.254: c119.047,48.058 r0.675
  lines w0.254: 118.371,44.343 119.047,44.681 119.722,44.343 119.384,45.019 119.722,45.694 119.047,45.356 118.371,45.694 118.709,45.019 118.371,44.343 ; 118.371,51.097 119.047,50.422 119.722,51.097 119.047,51.772 118.371,51.097 ; 118.371,53.461 119.722,53.461 119.722,54.812 118.371,54.812 118.371,53.461
  lines w0.381: 117.144,43.431 233.284,43.431 ; 117.144,55.588 233.284,55.588 ; 128.47,40.392 128.47,58.627 ; 140.523,40.392 140.523,58.627 ; 164.325,40.392 164.325,58.627 ; 174.739,40.392 174.739,58.627 ; 189.771,40.392 189.771,58.627 ; 220.257,40.392 220.257,58.627 ; 117.144,40.392 233.284,40.392 233.284,58.627 117.144,58.627 117.144,40.392
  text "Symbol" at 118.967,56.5 h1.46
  text "Count" at 129.381,56.5 h1.46
  text "Hole Size" at 141.435,56.5 h1.46
  text "Plated" at 165.237,56.5 h1.46
  text "Hole Type" at 175.651,56.5 h1.46
  text "Drill Layer Pair" at 190.683,56.5 h1.46
  text "Via/Pad" at 221.168,56.5 h1.46
  text "7" at 129.381,53.461 h1.22
  text "11,81mil (0,300mm)" at 141.435,53.461 h1.22
  text "PTH" at 165.237,53.461 h1.22
  text "Round" at 175.651,53.461 h1.22
  text "Top Layer - Bottom Layer" at 190.683,53.461 h1.22
  text "Via" at 221.168,53.461 h1.22
  text "11" at 129.381,50.422 h1.22
  text "125,98mil (3,200mm)" at 141.435,50.422 h1.22
  text "PTH" at 165.237,50.422 h1.22
  text "Round" at 175.651,50.422 h1.22
  text "Top Layer - Bottom Layer" at 190.683,50.422 h1.22
  text "Pad" at 221.168,50.422 h1.22
  text "24" at 129.381,47.382 h1.22
  text "72,05mil (1,830mm)" at 141.435,47.382 h1.22
  text "PTH" at 165.237,47.382 h1.22
  text "Round" at 175.651,47.382 h1.22
  text "Top Layer - Bottom Layer" at 190.683,47.382 h1.22
  text "Pad" at 221.168,47.382 h1.22
  text "121" at 129.381,44.343 h1.22
  text "39,37mil (1,000mm)" at 141.435,44.343 h1.22
  text "PTH" at 165.237,44.343 h1.22
  text "Round" at 175.651,44.343 h1.22
  text "Top Layer - Bottom Layer" at 190.683,44.343 h1.22
  text "Pad" at 221.168,44.343 h1.22
  text "163 Total" at 129.381,41.304 h1.22
  text "'.Layer_Name'" at 164.84,-36.827 h2.5
  text "'.Layer_Name'" at 164.84,-36.827 h2.5

## Dimensions
85.946,84.431 to 92.121,89.016 on Dimension
76.121,-0.134 to 73.346,89.016 on Dimension
92.169,81.058 to 73.346,89.016 on Dimension
-0.129,4.641 to 8.596,-0.159 on Dimension
8.596,-0.159 to 74.168,-0.289 on Dimension
-0.129,4.641 to 91.998,5.491 on Dimension
74.168,-0.089 to 91.998,7.47 on Dimension
74.076,-0.128 to 88.702,3.649 on Dimension
88.63,3.627 to 8.596,-0.159 on Dimension
91.06,3.64 to 92.169,81.058 on Dimension